# EAGLE board board (EAGLE 6.6.0)
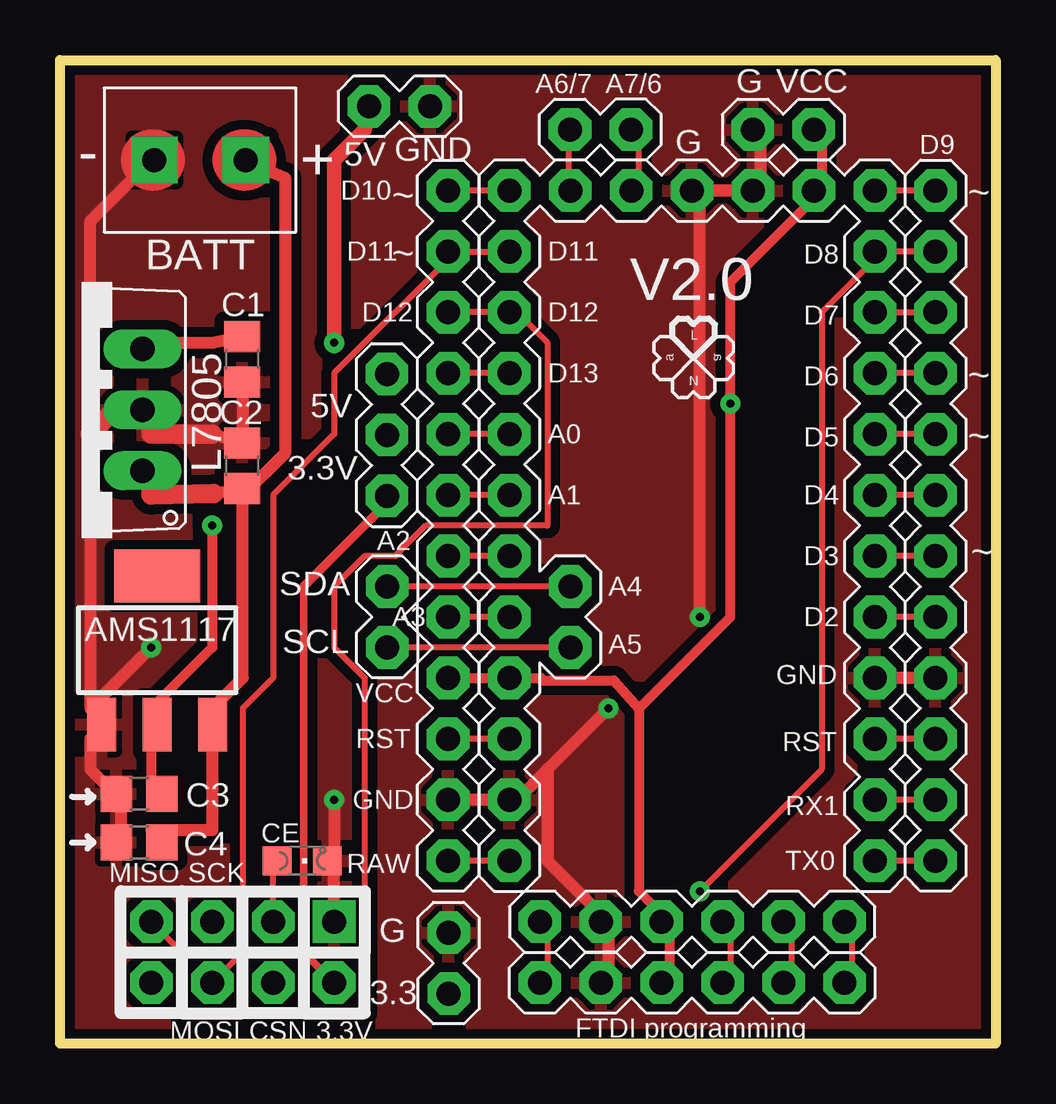
[diagram p0: board, top side]
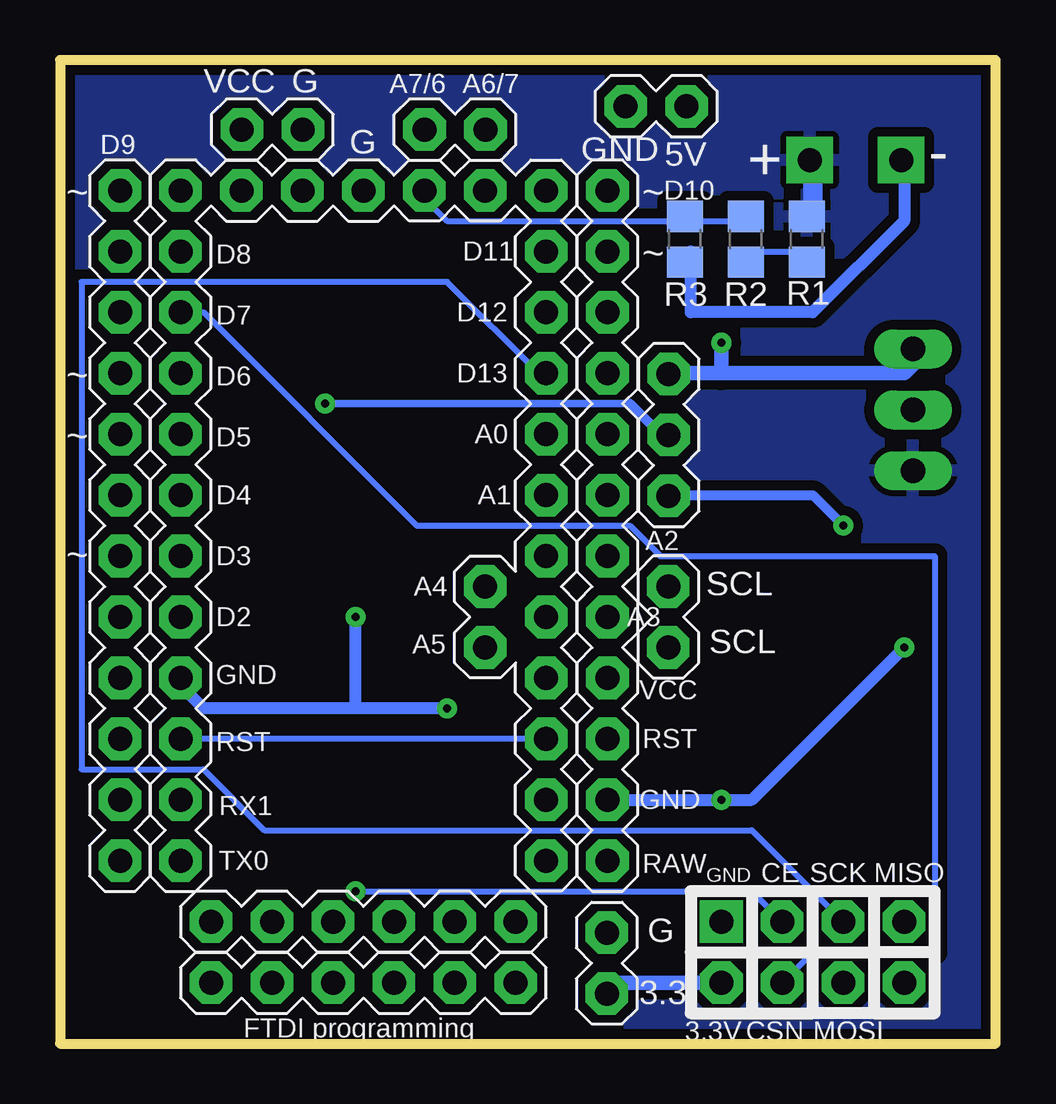
[diagram p1: board, bottom side, seen from below]

Size 39 x 41 mm. Coordinates in mm from the lower left corner, seen from the top.
Outline: 39,0 0,0 0,41 39,41 39,0
Copper layers (1*16): Top 0.0356mm / dielectric 1.5011mm / Bottom 0.0356mm
Design rules "Custom_DRC *": minimum track width 10mil, minimum drill 13mil, track to track 10mil, track to pad 9mil, pad to pad 10mil, via to via 10mil, smd to smd 10mil, copper to edge 15mil, drill to drill 10mil, minimum pad ring 12mil, minimum via ring 10mil, stop-mask expansion 3mil, vias tented up to drill 0mil, thermal gap 10mil
Net classes: 1 gnd: width 0.508 mm; 2 power: width 0.508 mm

## Footprints (pad centres in the part's own frame; a part is rotated, then mirrored left to right if it is on the bottom)
BLOCKTERM = drill 1 pad 1.93 square: P$1 0,-1.905; P$2 0,1.905
TO220V = drill 1.016 long: 1 -2.54,-2.54; 2 0,-2.54; 3 2.54,-2.54
6PIN = drill 1 pad 1.778 octagon: 1 -6.35,0; 2 -3.81,0; 3 -1.27,0; 4 1.27,0; 5 3.81,0; 6 6.35,0
0805_SMD_LED = smd 1.2 x 1.2: A 0,-1.05; C 0,1.05
AMS1117 = smd 1.219 x 2.235: 1 -2.311,-3.099; 2 0,-3.099; 3 2.311,-3.099 | smd 3.6 x 2.2: 4 0,3.099
ARDUINO = drill 1 pad 1.778 octagon: 3.3 1.587,15.24; 3.3_1 7.938,5.08; 3.3_2 -4.763,-15.24; A0 7.938,-5.08; A1 7.938,-2.54; A2 7.938,0; A3 7.938,2.54; A4 5.397,1.27; A5 5.397,3.81; A6/A7 5.397,-15.24; A7/A6 2.857,-15.24; BLK 6.668,15.24; D2 -7.303,2.54; D3 -7.303,0; D4 -7.303,-2.54; D5 -7.303,-5.08; D6 -7.303,-7.62; D7 -7.303,-10.16; D8 -7.303,-12.7; D9 -7.303,-15.24; D10 7.938,-15.24; D11 7.938,-12.7; D12 7.938,-10.16; D13 7.938,-7.62; GND 4.128,15.24; GND_1 7.938,10.16; GND_2 -2.223,-15.24; GND_3 -7.303,5.08; GND_4 0.318,-15.24; GRN -6.032,15.24; RAW 7.938,12.7; RST 7.938,7.62; RST_1 -7.303,7.62; RX -0.953,15.24; RX_1 -7.303,10.16; TX -3.493,15.24; TX_1 -7.303,12.7
ARDUINO_PIN_BREAKOUT = drill 1 pad 1.778 octagon: 1 -10.16,15.24; 2 -10.16,12.7; 3 -10.16,10.16; 4 -10.16,7.62; 5 -10.16,5.08; 6 -10.16,2.54; 7 -10.16,0; 8 -10.16,-2.54; 9 -10.16,-5.08; 10 -10.16,-7.62; 11 -10.16,-10.16; 12 -10.16,-12.7; 13 -5.08,-15.24; 14 -2.54,-15.24; 15 2.54,-15.24; 16 5.08,-15.24; 17 10.16,-12.7; 18 10.16,-10.16; 19 10.16,-7.62; 20 10.16,-5.08; 21 10.16,-2.54; 22 10.16,0; 23 10.16,2.54; 24 10.16,5.08; 25 10.16,7.62; 26 10.16,10.16; 27 10.16,12.7; 28 10.16,15.24; 29 12.7,6.35; 30 12.7,3.81
NRF24L01+ = drill 1 pad 1.778 octagon: 3.3V 2.54,0; CE 0,2.54; CSN 0,0; IRQ -5.08,0; MISO -5.08,2.54; MOSI -2.54,0; SCK -2.54,2.54 | drill 1 pad 1.778 square: GND 2.54,2.54
0805 = smd 1.3 x 1.5: 1 -0.95,0; 2 0.95,0
3PIN = drill 1 pad 1.778 octagon: 1 -2.54,0; 2 0,0; 3 2.54,0
2PIN = drill 1 pad 1.778 octagon: 1 -1.27,0; 2 1.27,0

## Placement (x,y rotation side)
BAT1  BLOCKTERM  [BLOCKTERM]  5.84,36.83 90 top
IC1  7805TV  [TO220V]  0.9,26.42 90 top
U$1  6PIN  [6PIN]  26.35,2.54 180 top
U$2  0805_SMD_LED  [0805_SMD_LED]  10.1,7.62 270 top
U$3  AMS1117  [AMS1117]  4.05,16.39 0 top
U$4  ARDUINO  [ARDUINO]  26.67,20.32 180 top
U$5  ARDUINO-PIN-BREAKOUT  [ARDUINO_PIN_BREAKOUT]  26.34,22.86 180 top
U$6  NRF24L01+  [NRF24L01+]  8.89,2.54 0 top
U$7  0805-RESISTOR  [0805]  7.87,33.53 90 bottom
U$8  0805-RESISTOR  [0805]  10.41,33.53 90 bottom
U$9  0805-RESISTOR  [0805]  12.95,33.53 90 bottom
U$10  3PIN  [3PIN]  13.63,25.37 270 top
U$11  0805-CAPACITOR  [0805]  7.59,24.08 90 top
U$12  0805-CAPACITOR  [0805]  7.59,28.52 90 top
U$13  0805-CAPACITOR  [0805]  3.3,10.41 0 top
U$14  0805-CAPACITOR  [0805]  3.3,8.38 0 top
U$15  2PIN  [2PIN]  16.21,3.35 90 top
U$16  2PIN  [2PIN]  14.15,39.07 180 top

## Library data of the parts
BAT1 = 00HeliLib
IC1 = linear
U$1 U$4-U$16 = headers
U$2 = 0805_SMD
U$3 = ref-packages

## Nets
3.3V: U$3.2 U$6.3.3V U$10.3 U$13.2 U$15.1
5V [power]: IC1.3 U$10.1 U$12.2 U$16.2
BAT+ [power]: BAT1.P$1 IC1.1 U$3.3 U$7.2 U$11.1 U$14.2
CE: U$2.A U$4.D8 U$5.11 U$6.CE
CSN: U$4.D7 U$5.10 U$6.CSN
GND [gnd]: BAT1.P$2 IC1.2 U$1.5 U$2.C U$3.1 U$4.GND U$4.GND_1 U$4.GND_2 U$4.GND_3 U$4.GND_4 U$5.4 U$5.14 U$5.27 U$6.GND U$9.1 U$11.2 U$12.1 U$13.1 U$14.1 U$15.2 U$16.1
IRQ: U$6.IRQ
MISO: U$4.D12 U$5.19 U$6.MISO
MOSI: U$4.D11 U$5.18 U$6.MOSI
N$1: U$7.1 U$8.1
N$2: U$4.A7/A6 U$5.15 U$8.2 U$9.2
N$3: U$4.D9 U$5.12
N$4: U$1.6 U$4.BLK
N$5: U$4.A4 U$5.30
N$6: U$4.A5 U$5.29
N$7: U$1.3 U$4.RX
N$8: U$1.2 U$4.TX
N$9: U$1.1 U$4.GRN
N$10: U$4.RAW U$5.28
N$14: U$4.A3 U$5.24
N$15: U$4.A2 U$5.23
N$16: U$4.A1 U$5.22
N$17: U$4.A0 U$5.21
N$21: U$4.D10 U$5.17
N$22: U$4.A6/A7 U$5.16
N$27: U$4.D6 U$5.9
N$28: U$4.D5 U$5.8
N$29: U$4.D4 U$5.7
N$30: U$4.D3 U$5.6
N$31: U$4.D2 U$5.5
N$34: U$4.RX_1 U$5.2
N$35: U$4.TX_1 U$5.1
RST: U$4.RST U$4.RST_1 U$5.3 U$5.26
SCK: U$4.D13 U$5.20 U$6.SCK
VCC: U$1.4 U$4.3.3 U$4.3.3_1 U$4.3.3_2 U$5.13 U$5.25 U$10.2

## Tracks (layer width: path | path; a pad name or v marks a point on that pad's centre or on a via)
3.3V  (via drill 0.33)
  Top 0.254: 3.81,10.16 U$13.2 | 3.81,12.7 U$3.2 3.81,13.97 | 13.97,22.86 U$10.3
  Top 0.305: U$6.3.3V 10.16,3.81 10.16,19.05
  Top 0.356: 13.97,22.86 10.16,19.05
  Top 0.406: 3.81,12.7 3.81,10.16 | 3.81,13.97 6.35,16.51 v6.35,21.59
  Bottom 0.254: 13.97,22.86 U$10.3
  Bottom 0.406: v6.35,21.59 7.62,22.86 13.97,22.86
  Bottom 0.61: U$6.3.3V 16.51,2.54 U$15.1
5V  (via drill 0.33)
  Top 0.508: U$12.2 6.35,29.21 3.81,29.21 IC1.3
  Top 0.61: v11.43,29.21 11.43,36.83 12.7,38.1 U$16.2
  Bottom 0.508: 13.97,27.94 U$10.1
  Bottom 0.61: 11.43,27.94 3.81,27.94 2.54,29.21 IC1.3 | 11.43,27.94 13.97,27.94 | 11.43,27.94 v11.43,29.21
BAT+
  Top 0.508: 6.41,22.92 U$11.1 7.62,22.86 | U$14.2 3.81,8.89 6.35,8.89 6.35,12.7 U$3.3 6.35,13.97 7.62,15.24 7.62,22.86 | 7.62,36.83 9.4,36.07 9.4,24.64 7.62,22.86
  Top 0.813: 6.41,22.92 3.81,22.86 3.81,24.13 IC1.1
  Top 2.54: 7.62,36.83 BAT1.P$1
  Bottom 0.508: 7.62,34.29 U$7.2 | 7.62,36.83 BAT1.P$1
  Bottom 0.813: 7.62,36.83 7.62,34.29
  pour Bottom (isolate 0.406): 0,0 39,0 39,41 0,41
CE  (via drill 0.33)
  Top 0.254: U$6.CE 8.89,7.62 U$2.A | 34.29,33.02 U$5.11 36.83,33.02 | v26.67,6.35 31.75,11.43 31.75,30.48 34.29,33.02 | 34.29,33.02 U$4.D8
  Bottom 0.254: U$6.CE 10.16,6.35 v26.67,6.35
CSN
  Top 0.254: U$4.D7 U$5.10 36.83,30.48
  Bottom 0.254: U$6.CSN 7.62,3.81 2.54,3.81 2.54,20.32 13.97,20.32 15.24,21.59 24.13,21.59 33.02,30.48 U$4.D7 34.29,30.48
GND  (via drill 0.33)
  Top 0.508: 2.54,10.16 2.54,8.89 U$14.1 | 2.54,10.16 1.27,11.43 1.27,12.7 U$3.1 1.27,13.97 | 2.54,10.16 U$13.1 | U$12.1 7.62,27.94 7.62,25.4 U$11.2 6.35,25.4 | 3.81,26.67 IC1.2 | 1.27,13.97 1.27,25.4 1.27,34.29 3.81,36.83 | 26.67,35.56 U$4.GND_2 29.21,35.56 29.21,38.1 U$5.14 | 22.86,5.08 22.86,2.54 U$1.5 | U$4.GND_3 U$5.4 36.83,15.24 | U$6.GND 11.43,7.62 | U$5.27 U$4.GND_1 19.05,10.16 20.32,11.43 | v11.43,10.16 11.43,7.62 | 11.43,7.62 U$2.C | 20.32,11.43 v22.86,13.97 | 22.86,5.08 20.32,7.62 20.32,11.43 | 22.86,5.08 U$4.GND | v26.67,17.78 26.67,35.56 | 26.67,35.56 U$4.GND_4 | v3.81,16.51 1.27,13.97
  Top 0.813: 6.35,25.4 3.81,25.4 3.81,26.67 | 1.27,25.4 2.54,26.67 IC1.2
  Top 2.54: 3.81,36.83 BAT1.P$2
  Bottom 0.508: U$9.1 12.7,33.02 12.7,30.48 7.62,30.48 3.81,34.29 3.81,36.83 BAT1.P$2 | 16.51,10.16 U$5.27 v11.43,10.16 10.16,10.16 v3.81,16.51 | v22.86,13.97 26.67,13.97 | 26.67,13.97 33.02,13.97 34.29,15.24 U$4.GND_3 | 26.67,13.97 v26.67,17.78
  pour Top (isolate 0.406): 0,0 39,0 39,41 0,41
MISO
  Top 0.254: U$5.19 U$4.D12 19.05,30.48 20.32,29.21 20.32,21.59 15.24,21.59 13.97,20.32 12.7,20.32 11.43,19.05 11.43,16.51 12.7,15.24 12.7,1.27 5.08,1.27 5.08,3.81 U$6.MISO
MOSI
  Top 0.254: U$6.MOSI 7.62,3.81 7.62,13.97 8.89,15.24 8.89,22.86 11.43,25.4 11.43,27.94 16.51,33.02 | 16.51,33.02 U$4.D11 19.05,33.02 | 16.51,33.02 U$5.18
N$1
  Bottom 0.254: U$7.1 7.62,33.02 10.16,33.02 U$8.1
N$2
  Top 0.254: U$5.15 24.13,38.1 24.13,35.56 U$4.A7/A6
  Bottom 0.254: 12.7,34.29 10.16,34.29 U$8.2 | 12.7,34.29 22.86,34.29 24.13,35.56 U$4.A7/A6 | 12.7,34.29 U$9.2
N$3
  Top 0.254: U$4.D9 U$5.12 36.83,35.56
N$4
  Top 0.254: U$1.6 20.32,2.54 20.32,5.08 U$4.BLK
N$5
  Top 0.254: U$5.30 U$4.A4 21.59,19.05
N$6
  Top 0.254: U$5.29 U$4.A5 21.59,16.51
N$7
  Top 0.254: U$1.3 27.94,2.54 27.94,5.08 U$4.RX
N$8
  Top 0.254: U$1.2 30.48,2.54 30.48,5.08 U$4.TX
N$9
  Top 0.254: U$1.1 33.02,2.54 33.02,5.08 U$4.GRN
N$10
  Top 0.254: U$5.28 U$4.RAW 19.05,7.62
N$14
  Top 0.254: U$5.24 U$4.A3 19.05,17.78
N$15
  Top 0.254: U$5.23 U$4.A2 19.05,20.32
N$16
  Top 0.254: U$5.22 U$4.A1 19.05,22.86
N$17
  Top 0.254: U$5.21 U$4.A0 19.05,25.4
N$21
  Top 0.254: U$5.17 U$4.D10 19.05,35.56
N$22
  Top 0.254: U$5.16 21.21,37.85 21.21,35.31 U$4.A6/A7
N$27
  Top 0.254: U$4.D6 U$5.9 36.83,27.94
N$28
  Top 0.254: U$4.D5 U$5.8 36.83,25.4
N$29
  Top 0.254: U$4.D4 U$5.7 36.83,22.86
N$30
  Top 0.254: U$4.D3 U$5.6 36.83,20.32
N$31
  Top 0.254: U$4.D2 U$5.5 36.83,17.78
N$34
  Top 0.254: U$4.RX_1 U$5.2 36.83,10.16
N$35
  Top 0.254: U$4.TX_1 U$5.1 36.83,7.62
RST
  Top 0.254: U$4.RST_1 U$5.3 36.83,12.7 | U$5.26 U$4.RST 19.05,12.7
  Bottom 0.254: U$4.RST U$4.RST_1 34.29,12.7
SCK
  Top 0.254: U$5.20 U$4.D13 19.05,27.94
  Bottom 0.254: U$6.SCK 10.16,8.89 30.48,8.89 33.02,11.43 38.1,11.43 38.1,31.75 22.86,31.75 19.05,27.94 U$4.D13
VCC  (via drill 0.33)
  Top 0.254: 31.75,35.56 U$4.3.3_2
  Top 0.406: U$5.13 31.75,38.1 31.75,35.56 27.94,31.75 v27.94,26.67 27.94,17.78 24.13,13.97 | 25.4,5.08 25.4,2.54 U$1.4 | U$5.25 U$4.3.3_1 20.04,15.24 20.04,15.14 23.09,15.14 24.13,13.97 | 25.4,5.08 24.13,6.35 24.13,13.97 | 25.4,5.08 U$4.3.3
  Bottom 0.254: 16.51,15.24 U$5.25
  Bottom 0.305: v27.94,26.67 15.24,26.67
  Bottom 0.406: 15.24,26.67 13.97,25.4 U$10.2

## Text on the board
tPlace: A6/7 | A7/6 | G | VCC | 5V | GND | G | D9 | - | + | D10 | ~ | ~ | D11 | D11 | D8 | BATT | ~ | V2.0 | C1 | D12 | D12 | D7 | L | D13 | a | N | a | D6 | ~ | C2 | 5V | A0 | D5 | ~ | L7805 | 3.3V | A1 | D4 | A2 | D3 | ~ | SDA | A4 | AMS1117 | A3 | D2 | SCL | A5 | GND | VCC | RST | RST | C3 | GND | RX1 | C4 | CE | MISO | SCK | RAW | TX0 | G | 3.3 | MOSI | CSN | 3.3V | FTDI programming
bPlace: A6/7 | A7/6 | G | VCC | 5V | GND | G | D9 | - | + | D10 | ~ | ~ | D11 | D8 | ~ | R1 | R2 | R3 | D12 | D7 | D13 | D6 | ~ | A0 | D5 | ~ | A1 | D4 | A2 | D3 | ~ | SCL | A4 | A3 | D2 | SCL | A5 | GND | VCC | RST | RST | GND | RX1 | MISO | SCK | CE | GND | RAW | TX0 | G | 3.3 | MOSI | CSN | 3.3V | FTDI programming